# Altium PCB PCB_Constant-Current_2022-05-03.pcbdoc
Units mm, origin at the board's own origin, x right, y up, seen from the top; angles counter-clockwise.
Board outline 146.05 x 76.07 mm, 2 copper layers (Top Layer, Bottom Layer); 17 components, 17 nets, 77 pads, 1 vias.
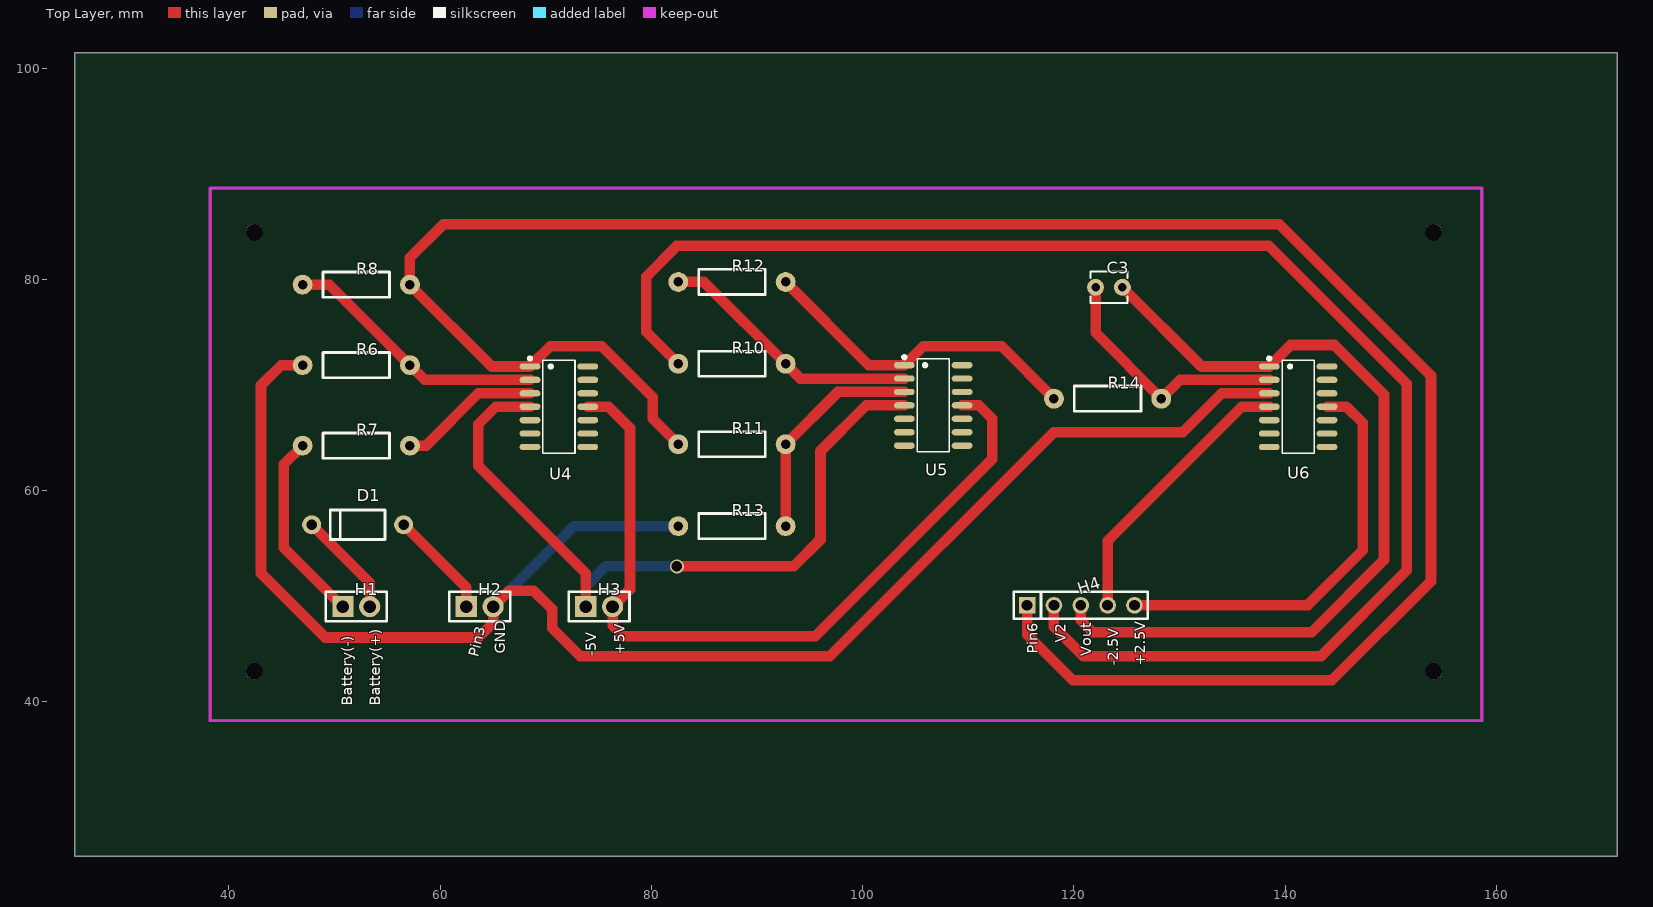
[diagram p0: Top Layer view]
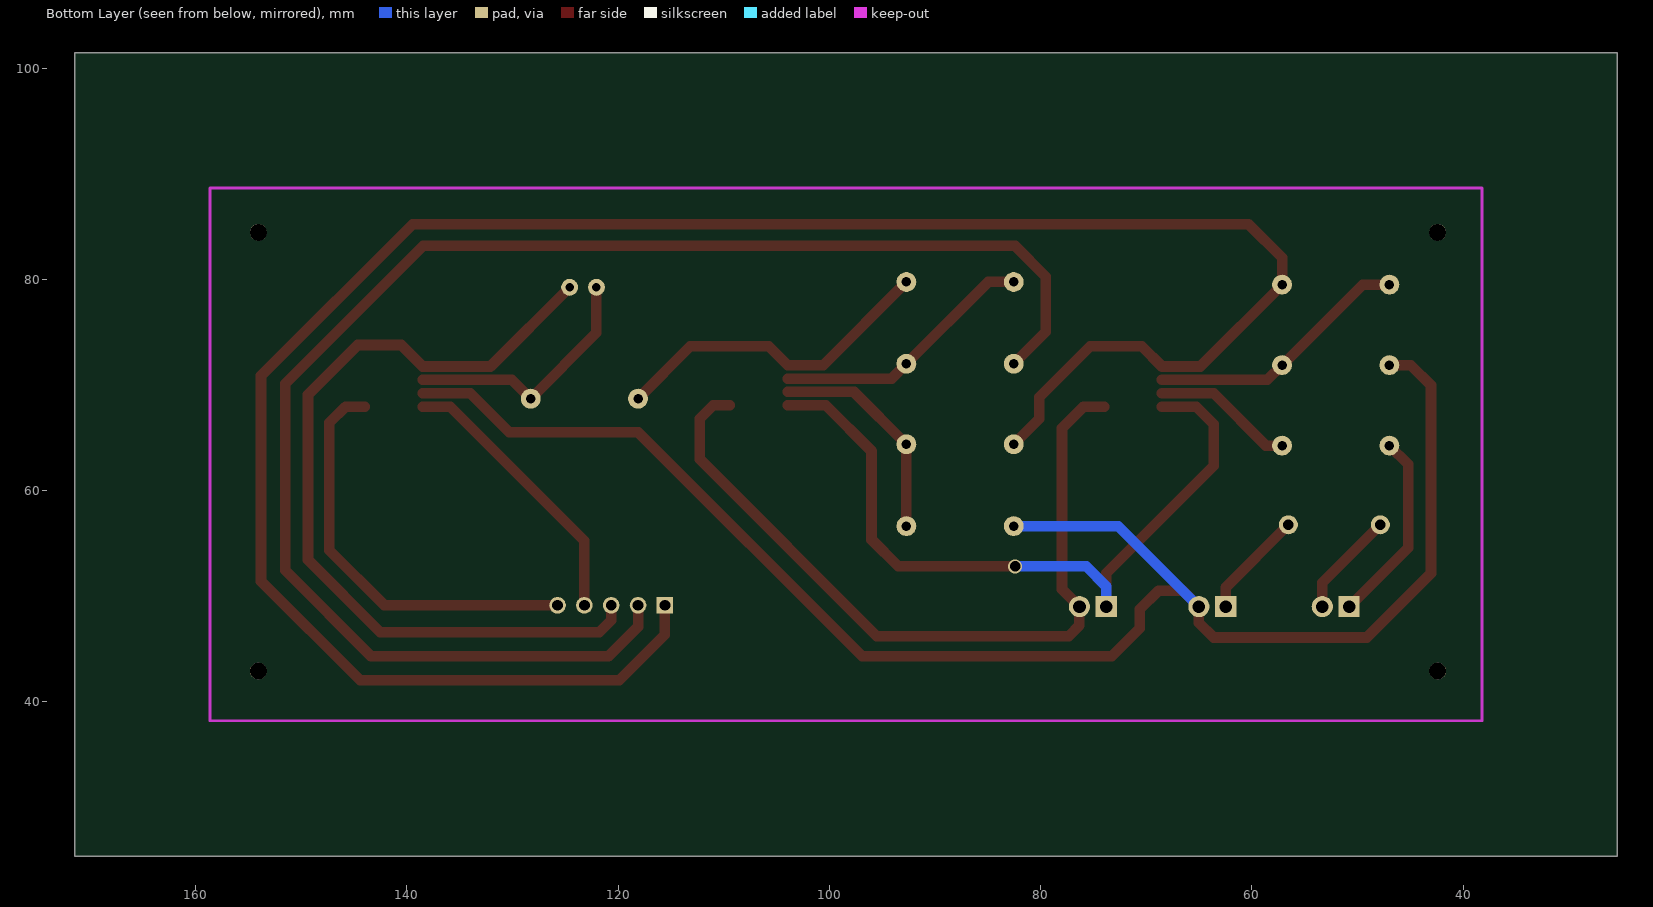
[diagram p1: Bottom Layer view, seen from below]

## Layer stack, top to bottom
Top Layer: signal copper (thickness not stored)
Dielectric: dielectric 0.32, FR-4, Dk 4.8
Bottom Layer: signal copper (thickness not stored)

## Board outline
171.45,25.4 25.4,25.4 25.4,101.473 171.45,101.473

## Components (designator, comment, footprint, x,y, rotation, side; value= is the part's Value field where it differs from the comment)
C3 "1uF" CAP-TH_L3.5-W3.0-P2.54-D0.8 123.317,79.248 r0 top
D1 "1N5819" DO-41_BD2.4-L4.7-P8.70-D0.9-RD 52.197,56.769 r0 top
H1 "Header-Female-2.54_1x2" HDR-TH_2P-P2.54-V-F 52.07,49.022 r0 top
H2 "Header-Female-2.54_1x2" HDR-TH_2P-P2.54-V-F 63.754,49.022 r0 top
H3 "Header-Female-2.54_1x2" HDR-TH_2P-P2.54-V-F 75.057,49.022 r0 top
H4 "Header-Female-2.54_1x5" HDR-TH_5P-P2.54-V-F 120.65,49.149 r0 top
R6 "220" AXIAL-0.4 52.07,71.882 r0 top
R7 "0.1" AXIAL-0.4 52.07,64.262 r0 top
R8 "3.3k" AXIAL-0.4 52.07,79.502 r0 top
R10 "4.7k" AXIAL-0.4 87.63,72.009 r0 top
R11 "4.7k" AXIAL-0.4 87.63,64.389 r0 top
R12 "1k" AXIAL-0.4 87.63,79.756 r0 top
R13 "1k" AXIAL-0.4 87.63,56.642 r0 top
R14 "7.5k" AXIAL-0.4 123.19,68.707 r0 top
U4 "LM324D" SO-14_L8.9-W3.9-P1.27-LS6.0-BL 71.247,67.945 r270 top
U5 "LM324D" SO-14_L8.9-W3.9-P1.27-LS6.0-BL 106.68,68.072 r270 top
U6 "LM324D" SO-14_L8.9-W3.9-P1.27-LS6.0-BL 141.224,67.945 r270 top

## Footprints (in the part's own frame and the unit in brackets; to place one, negate y for a bottom-side part, rotate by r counter-clockwise, add the part's x,y. Pads: shape width x height; smd on the part's side, far side on the other; paste and mask are expansions set on the pad)
AXIAL-0.4 [mil]
  round 74 hole 35.4: 1(-200,0) 2(200,0)
  silkscreen extent -124,-47 124,47
CAP-TH_L3.5-W3.0-P2.54-D0.8 [mm]
  round 1.6 hole 0.8: 1(-1.27,0) 2(1.27,0)
  silkscreen extent -1.75,-1.5 1.75,1.5
DO-41_BD2.4-L4.7-P8.70-D0.9-RD [mm]
  round 1.8 hole 1: 1(-4.35,0) 2(4.35,0)
  silkscreen extent -2.6,-1.4 2.6,1.4
HDR-TH_2P-P2.54-V-F [mm]
  rect 2x2 hole 1.2: 1(-1.27,0)
  round 2 hole 1.2: 2(1.27,0)
  silkscreen extent -2.88,-1.39 2.88,1.4
HDR-TH_5P-P2.54-V-F [mil]
  rect 62x62 hole 40.16: 1(-200,0)
  round 62 hole 40.16: 2(-100,0) 3(0,0) 4(100,0) 5(200,0)
  silkscreen extent -250,-50 250,50
SO-14_L8.9-W3.9-P1.27-LS6.0-BL [mm]
  oval 0.595x1.968 smd: 1(-3.81,-2.734) 2(-2.54,-2.734) 3(-1.27,-2.734) 4(0,-2.734) 5(1.27,-2.734) 6(2.54,-2.734) 7(3.81,-2.734) 8(3.81,2.734) 9(2.54,2.734) 10(1.27,2.734) 11(0,2.734) 12(-1.27,2.734) 13(-2.54,2.734) 14(-3.81,2.734)
  silkscreen extent -4.71,-2.88 4.4,1.52

## Free pads (board coordinates)
  round 1.6 hole 1.6: 2(42.418,42.926) 2(42.418,84.455) 2(154.051,42.926) 2(154.051,84.455)

## Via types
v1: diameter 1.3, hole 1, Top Layer to Bottom Layer, tented both sides, 1 vias

## Nets (pads, with @x,y where several pads share a name; then routed paths per layer and width w, separated by ;. In a path a pad name is that pad's centre, name@x,y a point inside that pad or via, vN(x,y) a via of type N, cw(c..) or ccw(c..) an arc to the next point about the centre after c; other vN are vias at no path point)
+2.5V: H4.5 U6.11 | length 39.8
  Top Layer w1: H4.5 142.113,49.149 147.32,54.356 147.32,66.421 145.796,67.945 U6.11
+5V: H3.2 U4.11 U5.11 | length 74.7
  Top Layer w1: U4.11 75.946,67.945 77.978,65.913 77.978,50.673 H3.2 76.327,47.244 77.343,46.228 95.504,46.228 112.268,62.992 112.268,66.802 110.998,68.072 U5.11
-2.5V: H4.4 U6.4 | length 26.7
  Top Layer w1: H4.4 123.19,55.245 135.89,67.945 U6.4
-5V: H3.1 U4.4 U5.4 | length 71.1
  Top Layer w1: U4.4 65.278,67.945 63.627,66.294 63.627,62.357 73.787,52.197 H3.1 ; v1(82.423,52.832) 93.472,52.832 96.012,55.372 96.012,63.754 100.33,68.072 U5.4
  Bottom Layer w1: H3.1 73.787,50.927 75.692,52.832 v1(82.423,52.832)
BATTERY(+): D1.1 H1.2 | length 10
  Top Layer w1: D1.1 53.34,51.276 H1.2
BATTERY(-): H1.1 R7.1 | length 18.3
  Top Layer w1: R7.1 45.212,62.484 45.212,54.61 H1.1
GND: H2.2 R6.1 R13.1 U6.3 | length 157.8
  Top Layer w1: R6.1 44.958,71.882 43.053,69.977 43.053,52.197 49.149,46.101 63.627,46.101 65.024,47.498 H2.2 66.548,50.546 68.834,50.546 70.612,48.768 70.612,46.99 73.279,44.323 96.901,44.323 118.11,65.532 130.302,65.532 133.985,69.215 U6.3
  Bottom Layer w1: H2.2 72.644,56.642 R13.1
PIN3: D1.2 H2.1 | length 10.2
  Top Layer w1: D1.2 62.484,50.832 H2.1
POWER(1): H4.2 R10.1 | length 145.8
  Top Layer w1: R10.1 79.502,75.057 79.502,80.264 82.423,83.185 138.43,83.185 151.511,70.104 151.511,52.451 143.383,44.323 120.904,44.323 118.11,47.117 H4.2
U2.1-U2.2: H4.1 R8.2 R11.1 U4.1 | length 207
  Top Layer w1: U4.1 64.897,71.755 R8.2 57.15,82.042 60.325,85.217 139.446,85.217 153.797,70.866 153.797,51.435 144.399,42.037 119.888,42.037 115.57,46.355 H4.1 ; U4.1 70.419,73.66 75.311,73.66 80.137,68.834 80.137,66.802 R11.1
U2.2-U2.3: R12.2 R14.1 U5.1 | length 31.4
  Top Layer w1: R12.2 100.584,71.882 U5.1 ; U5.1 105.725,73.66 113.157,73.66 R14.1
U4_2: R6.2 R8.1 U4.2 | length 25.3
  Top Layer w1: R8.1 49.53,79.502 R6.2 58.547,70.485 U4.2
U4_3: R7.2 U4.3 | length 13.4
  Top Layer w1: R7.2 58.674,64.262 63.627,69.215 U4.3
U5_2: R10.2 R12.1 U5.2 | length 25.2
  Top Layer w1: R12.1 84.963,79.756 R10.2 94.107,70.612 U5.2
U5_3: R11.2 R13.2 U5.3 | length 21
  Top Layer w1: R13.2 R11.2 97.663,69.342 U5.3
U6_2: C3.1 R14.2 U6.2 | length 24.1
  Top Layer w1: C3.1 122.047,74.93 R14.2 130.048,70.485 U6.2
VOUT: C3.2 H4.3 U6.1 | length 79.7
  Top Layer w1: H4.3 120.65,47.752 121.793,46.609 142.494,46.609 149.352,53.467 149.352,69.088 144.653,73.787 140.523,73.787 U6.1 ; C3.2 132.08,71.755 U6.1
pads on no net: U4.5 U4.6 U4.7 U4.8 U4.9 U4.10 U4.12 U4.13 U4.14 U5.5 U5.6 U5.7 U5.8 U5.9 U5.10 U5.12 U5.13 U5.14 U6.5 U6.6 U6.7 U6.8 U6.9 U6.10 U6.12 U6.13 U6.14

## Polygon pours and split planes (outlines as drawn)
GND on Top Layer (solid): 38.354,88.519 38.354,38.354 158.496,38.354 158.496,88.519

## Silkscreen, mask and mechanical layers (free items; w line width, h text height)
Top Overlay:
  text "V2" at 119.245,45.593 h1 r90
  text "GND" at 66.159,44.577 h1 r90
  text "Pin6" at 116.578,44.577 h1 r90
  text "+5V" at 77.462,44.45 h1 r90
  text "-5V" at 74.795,44.323 h1 r90
  text "Vout" at 121.658,44.323 h1 r90
  text "Pin3" at 63.604,44.202 h1 r76
  text "-2.5V" at 124.198,43.434 h1 r90
  text "+2.5V" at 126.738,43.434 h1 r90
  text "Battery(-)" at 51.681,39.624 h1 r90
  text "Battery(+)" at 54.348,39.624 h1 r90